# EAGLE board mp3431-boost-tester-mk-1.0.0 (EAGLE 9.2.2)
VERSION: v2.0

Size 20 x 20 mm. Coordinates in mm from the lower left corner, seen from the top.
Outline: 0,0 0,20 20,20 20,0 0,0
Copper layers (1*16): Top 0.035559375mm / dielectric 1.6mm / Bottom 0.035559375mm
Design rules "oshpark-2layer": minimum track width 6mil, minimum drill 10mil, track to track 6mil, track to pad 6mil, pad to pad 6mil, via to via 6mil, smd to smd 0mil, copper to edge 15mil, drill to drill 6mil, minimum pad ring 5mil, minimum via ring 5mil, stop-mask expansion 2.5mil, vias tented up to drill 20mil, thermal gap 10mil

## Footprints (pad centres in the part's own frame; a part is rotated, then mirrored left to right if it is on the bottom)
C1206 = smd 1.2 x 1.8: 1 -1.4,0; 2 1.4,0
C0402 = smd 0.6 x 0.7: 1 -0.5,0; 2 0.5,0
SOD323-SCHOTTKY = smd 0.6 x 0.6: A -1.1,0; C 1.1,0
PAD-JUMPER-3-NO_YES_SILK_SMALL_BOX = smd 0.8 x 1: 1 -1,0; 2 0,0; 3 1,0
2X3 = drill 1 pad 1.676 octagon: 1 -2.54,-1.27; 2 -2.54,1.27; 3 0,-1.27; 4 0,1.27; 5 2.54,-1.27; 6 2.54,1.27
XAL7070 = smd 1.9 x 6.5: P$1 -2.41,0; P$2 2.41,0
1X01-1.2MM-NS = drill 1.2 pad 1.93: P$1 0,0
R1206 = smd 1.2 x 1.8: 1 -1.4,0; 2 1.4,0
R0402 = smd 0.6 x 0.7: 1 -0.5,0; 2 0.5,0
MP3431 = smd 2.3 x 0.3: 1 -0.65,0; 7 0.65,-0.6; 8 0.65,0.6 | smd 0.25 x 0.8: 2 -1,-1.9; 3 -0.5,-1.9; 4 0,-1.9; 5 0.5,-1.9; 6 1,-1.9; 9 1,1.9; 10 0.5,1.9; 11 0,1.9; 12 -0.5,1.9; 13 -1,1.9
UQFN-10 = smd 0.2 x 0.7: 1 -0.2,-0.55 | smd 0.2 x 0.6: 2 0.2,-0.6; 6 0.2,0.6; 7 -0.2,0.6 | smd 0.6 x 0.2: 3 0.8,-0.4; 4 0.8,0; 5 0.8,0.4; 8 -0.8,0.4; 9 -0.8,0; 10 -0.8,-0.4
SC70 = smd 0.4 x 0.9: 1 -0.65,-1.1; 2 0,-1.1; 3 0.65,-1.1; 4 0.65,1.1; 5 -0.65,1.1
QFN20 = smd 0.65 x 0.3: 1 -1.9,1; 2 -1.9,0.5; 3 -1.9,0; 4 -1.9,-0.5; 5 -1.9,-1; 11 1.9,-1; 12 1.9,-0.5; 13 1.9,0; 14 1.9,0.5; 15 1.9,1 | smd 0.3 x 0.65: 6 -1,-1.9; 7 -0.5,-1.9; 8 0,-1.9; 9 0.5,-1.9; 10 1,-1.9; 16 1,1.9; 17 0.5,1.9; 18 0,1.9; 19 -0.5,1.9; 20 -1,1.9 | smd 1 x 1: PAD 0,0

## Placement (x,y rotation side)
C1  68uF  [C1206]  6.5,4.5 0 top
C2  4.7uF  [C0402]  11.5,5.5 90 top
C3  47uF  [C1206]  16,9.5 90 top
C4  47uF  [C1206]  18.5,9.5 90 top
C5  1uF  [C0402]  16,16.5 0 top
C6  0.1uF  [C0402]  11,13 270 top
C7  1nF  [C0402]  11.5,22.5 90 top
C8  1uF  [C0402]  3.5,19 180 top
C9  22nF  [C0402]  13,5.5 90 top
C10  ???  [C0402]  13,3 0 top
D1  BAT165  [SOD323-SCHOTTKY]  29.4,7.4 180 top  (outside the outline)
EN  [PAD-JUMPER-3-NO_YES_SILK_SMALL_BOX]  8.1,17.5 270 top
FRAME1  FRAME-LETTERNO_PACKAGE  [DUMMY]  0,0 0 top
J1  AVR_SPI_PRG_6PTH  [2X3]  29.2,20.4 0 top  (outside the outline)
L1  1uH  [XAL7070]  6,9.5 90 top
LED+  M01PTH-1.2MM-NS  [1X01-1.2MM-NS]  18.5,18.5 180 top
LED-  M01PTH-1.2MM-NS  [1X01-1.2MM-NS]  15.6,18.5 0 top
MODE  [PAD-JUMPER-3-NO_YES_SILK_SMALL_BOX]  10,17.5 270 top
R1  10mOhm  [R1206]  18.5,14.5 90 top
R2  19.1K  [R0402]  24.5,15.5 270 top  (outside the outline)
R3  4.7K  [R0402]  23,15.5 270 top
R4  6.8k  [R0402]  14,15 90 top
R5  1k  [R0402]  15.5,4.5 180 top
R6  75K  [R0402]  15.5,6 180 top
R7  15K  [R0402]  15.5,3 180 top
R8  130k  [R0402]  12.5,17.5 90 top
R9  20k  [R0402]  13.5,17.5 90 top
R10  ???  [R0402]  10.5,3 0 top
U1  MP3431  [MP3431]  12.5,9.5 0 top
U2  INA190RSW  [UQFN-10]  16,14.7 0 top
U3  V_REG_ENTLV700  [SC70]  27,4.9 0 top  (outside the outline)
U4  ATTINY45TINY85-20-QFN  [QFN20]  3.5,16 0 top
VIN+  M01PTH-1.2MM-NS  [1X01-1.2MM-NS]  5,1.5 0 top
VIN-  M01PTH-1.2MM-NS  [1X01-1.2MM-NS]  8,1.5 0 top

## Library data of the parts
C1-C10 D1 EN J1 L1 LED+ LED- MODE R1-R10 U1-U4 VIN+ VIN- = a_parts
FRAME1 = a_parts; DESIGNER: sean@yak.net; VERSION: v2.0.1

## Nets
ALTPWM/MOSI: EN.3 J1.4 U4.11
BST: C6.2 U1.13
COMP: C10.2 U1.4
COMP_MID: C10.1 R10.2
CSOUT: R5.1 U2.10
ENABLE: EN.2 U1.11
FB: R5.2 R6.2 R7.2 U1.5
GND: C1.2 C2.1 C3.1 C4.1 C5.1 C7.1 C8.2 C9.1 J1.6 LED-.P$1 R3.1 R7.1 R9.1 R10.1 U1.6 U1.7 U1.9 U2.9 U3.2 U4.8 U4.PAD VIN-.P$1
LED+: LED+.P$1 R1.2 R6.1 U2.4
MODE: MODE.2 U1.10
MODE_PD: MODE.3 R8.2 R9.2
PWM/MISO: C7.2 J1.1 R4.2 U4.12
REF: R4.1 U2.8
RST: J1.5 U4.1
SOFTSTART: C9.2 U1.3
SW: C6.1 L1.P$2 U1.1
VBAT: C1.1 D1.A EN.1 L1.P$1 MODE.1 U1.12 VIN+.P$1
VBAT_RECT: D1.C R2.1 U3.1 U3.3
VCC: C5.2 C8.1 J1.2 U2.6 U2.7 U3.5 U4.15
VDD: C2.2 R8.1 U1.2
VDIV/SCK: J1.3 R2.2 R3.2 U4.14
VOUT: C3.2 C4.2 R1.1 U1.8 U2.3

## Tracks (layer width: path | path; a pad name or v marks a point on that pad's centre or on a via)
ALTPWM/MOSI  (2 unrouted)
BST  (1 unrouted)
COMP  (1 unrouted)
COMP_MID  (1 unrouted)
CSOUT  (1 unrouted)
ENABLE  (1 unrouted)
FB  (3 unrouted)
GND  (21 unrouted)
LED+  (3 unrouted)
MODE  (1 unrouted)
MODE_PD  (2 unrouted)
PWM/MISO  (3 unrouted)
REF  (1 unrouted)
RST  (1 unrouted)
SOFTSTART  (1 unrouted)
SW  (2 unrouted)
VBAT  (6 unrouted)
VBAT_RECT  (3 unrouted)
VCC  (6 unrouted)
VDD  (2 unrouted)
VDIV/SCK  (3 unrouted)
VOUT  (4 unrouted)

## Text on the board
bPlace: MP28614 | LED Driver